# Altium PCB PCB.PcbDoc (part 1 of 2)
Units mm, origin at the board's own origin, x right, y up, seen from the top; angles counter-clockwise.
Board outline 100 x 25 mm, 4 copper layers (Top Layer, Layer 2, Layer 3, Bottom Layer), stack 1.513 mm thick; 98 components, 75 nets, 360 pads, 1081 vias.
Unrouted connection lines stored in the file: 86.
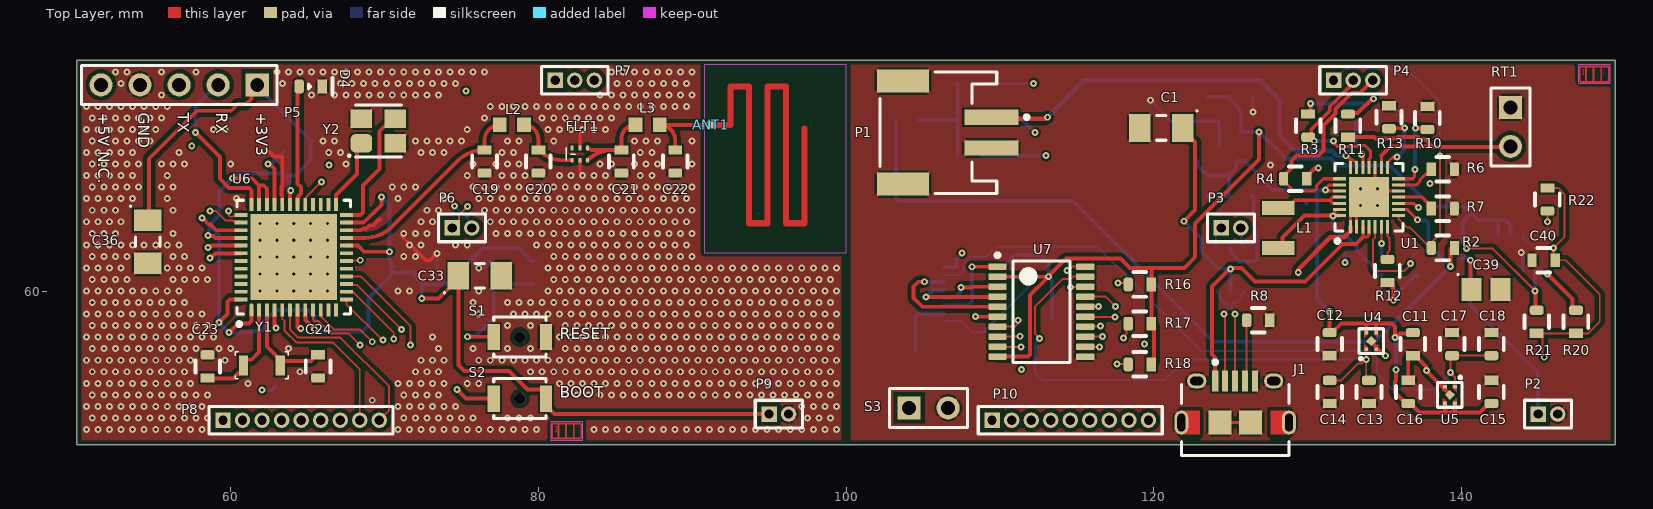
[diagram p0: Top Layer view]
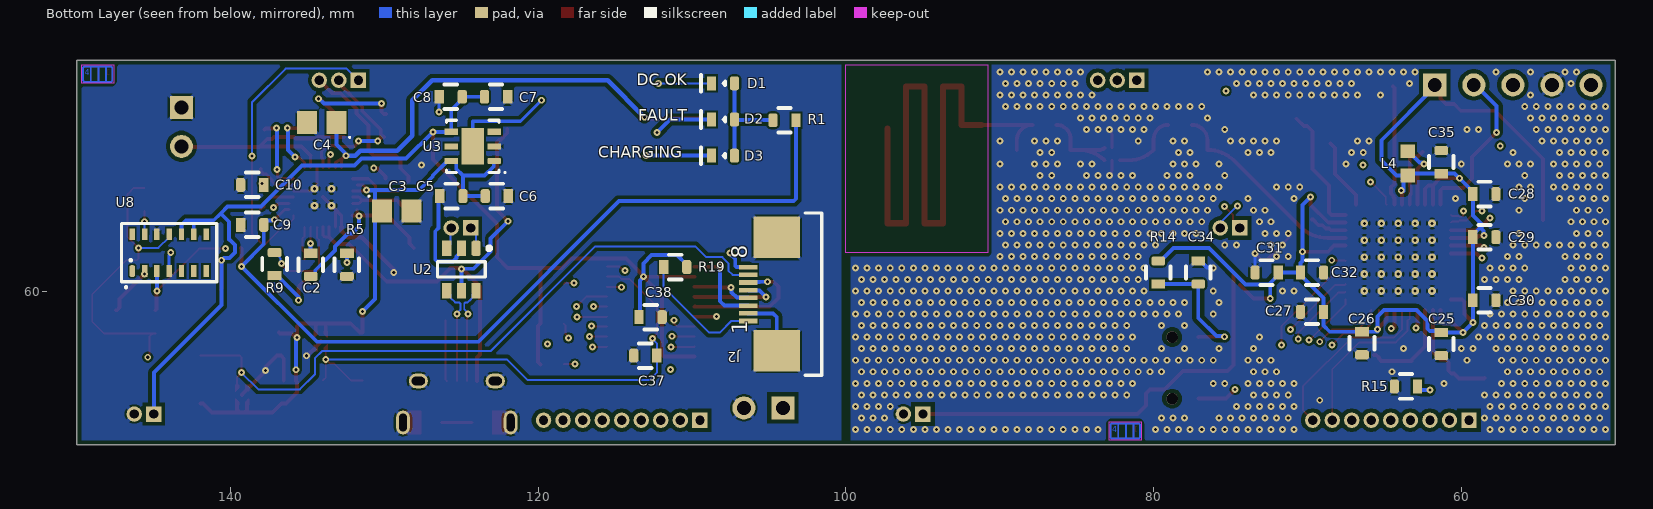
[diagram p1: Bottom Layer view, seen from below]
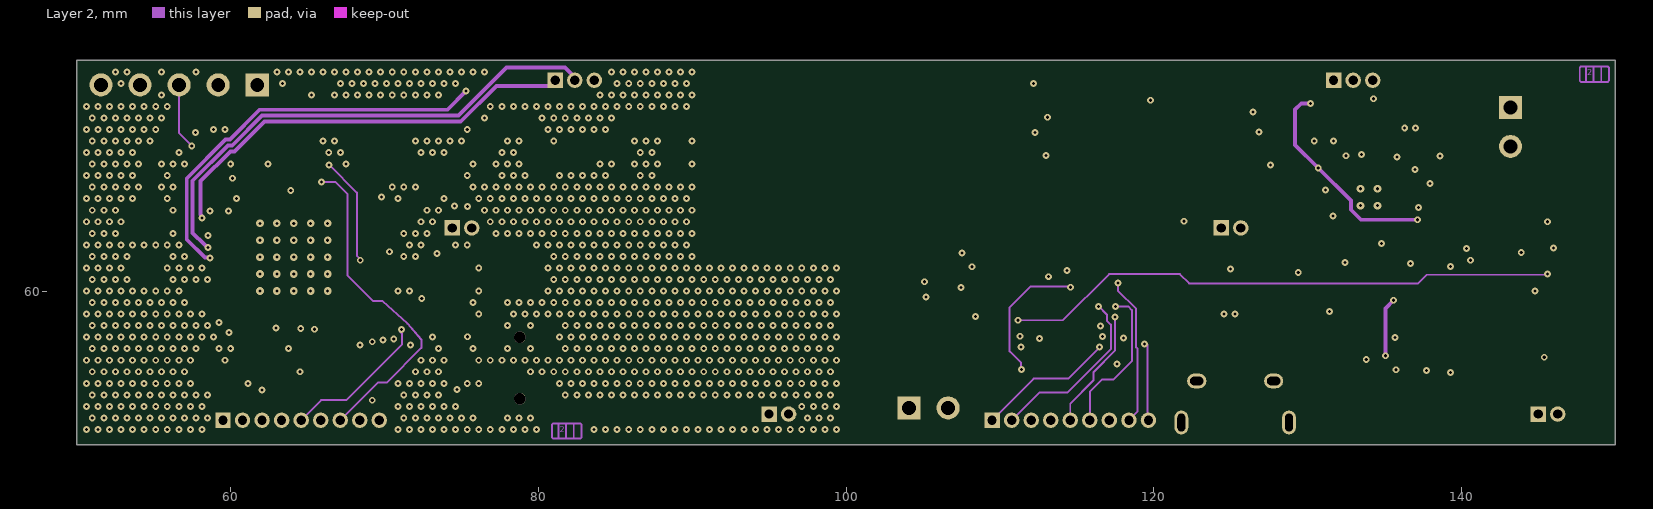
[diagram p2: Layer 2]
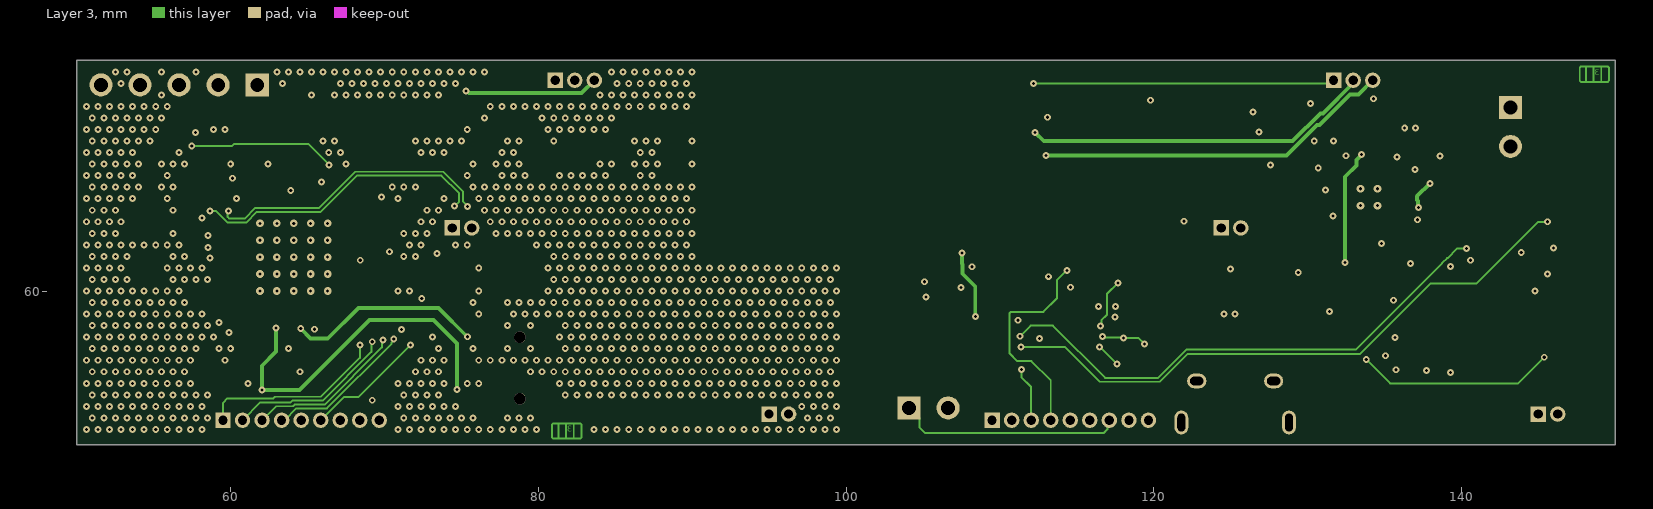
[diagram p3: Layer 3]
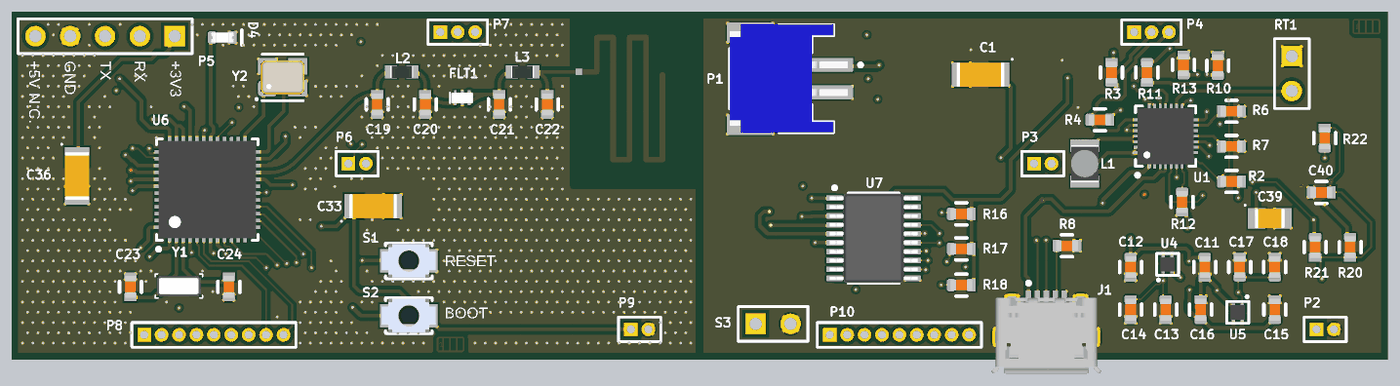
[diagram p5: 3D render of the assembled board from above, using the file's embedded part models]
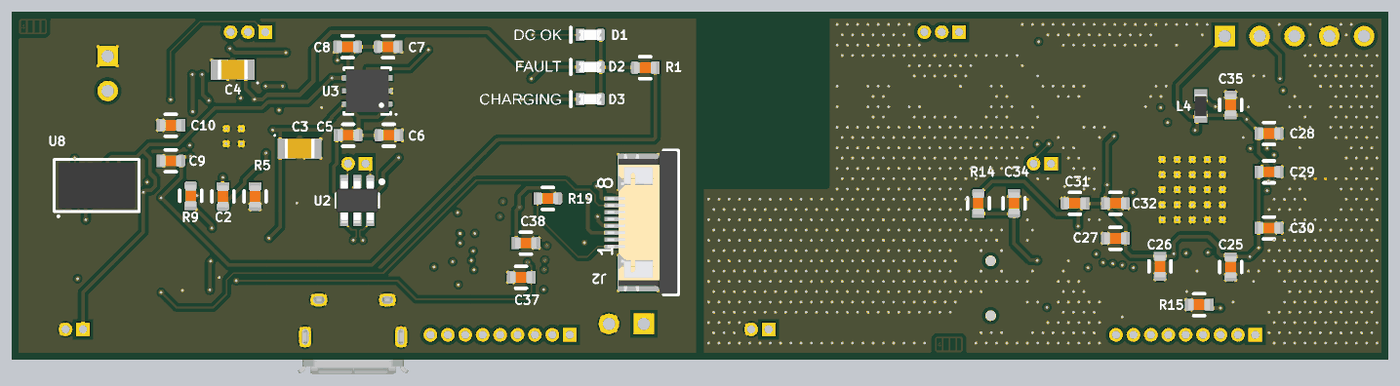
[diagram p6: 3D render of the assembled board from below, using the file's embedded part models]

## Layer stack, top to bottom
Top Solder: solder mask 0.0254, SM-001, Dk 4
Top Layer: signal copper 0.035
Dielectric 2: prepreg 0.2083, PP-022, Dk 4.5
Layer 2: signal copper 0.018
Dielectric 1: core 0.9906, Core-042, Dk 4.6
Layer 3: signal copper 0.018
Dielectric 3: prepreg 0.2083, PP-022, Dk 4.5
Bottom Layer: signal copper 0.035
Bottom Solder: solder mask 0.0254, SM-001, Dk 4

## Board outline
50,50 150,50 150,75 50,75

## Design rules (kind name [scope] priority, off if disabled: settings)
BoardOutlineClearance SilkScreen [OnSilkscreen] p1: gap=0.1 ignorepadtopadclearanceinfootprint=FALSE
BoardOutlineClearance [All] p2: gap=0.2 ignorepadtopadclearanceinfootprint=FALSE
Clearance [All] p1: gap=0.254 ignorepadtopadclearanceinfootprint=TRUE except(0: Arc-Hole Track-Hole SMDPad-Hole THPad-Hole Via-Hole Fill-Hole Poly-Hole Region-Hole Text-Hole; 0.127: Track-Track SMDPad-SMDPad SMDPad-Poly SMDPad-Region THPad-Region Via-Fill Via-Poly; 0.2: Arc-SMDPad Arc-THPad Track-SMDPad Track-THPad; 0.5: THPad-THPad)
ComponentClearance [All] p1: gap=0.05 collisioncheckmode=3 verticalgap=0.254 showdistances=FALSE
DiffPairsRouting [All] p1: maxlimit=0.254 minlimit=0.127 mostfreqgap=0.127 toplayer_minwidth=0.127 toplayer_maxwidth=0.381 toplayer_prefwidth=0.127 midlayer1_minwidth=0.127 midlayer1_maxwidth=0.381 midlayer1_prefwidth=0.127 midlayer2_minwidth=0.127 midlayer2_maxwidth=0.381 midlayer2_prefwidth=0.127 bottomlayer_minwidth=0.127 bottomlayer_maxwidth=0.381 bottomlayer_prefwidth=0.127 maxuncoupledlength=12.7
HoleSize [All] p1: absolutevalues=TRUE maxlimit=6.3 minlimit=0.2 maxpercent=80.000 minpercent=20.000
HoleToHoleClearance [All] p1: gap=0.5 allowstackedmicrovias=TRUE
MinimumSolderMaskSliver [All] p1: minsoldermaskwidth=0.01
PlaneClearance [All] p1: clearance=0.254
PlaneConnect [All] p1: planeconnectstyle=Relief reliefexpansion=0.508 reliefentries=4 reliefconductorwidth=0.254 reliefairgap=0.127
PolygonConnect PolygonConnect_2 [All vs (InNamedPolygon('GND_L01_P003') AND InNamedUnion('Via Stitchings'))] p1: connectstyle=Direct reliefconductorwidth=0.254 reliefentries=4 polygonreliefangle="90 Angle" airgapwidth=0.254
PolygonConnect PolygonConnect_1 [All vs (InNamedPolygon('GND_L01_P003') AND InNamedUnion('Via Stitchings'))] p2: connectstyle=Direct reliefconductorwidth=0.254 reliefentries=4 polygonreliefangle="90 Angle" airgapwidth=0.254
PolygonConnect [All] p3: connectstyle=Relief reliefconductorwidth=0.254 reliefentries=4 polygonreliefangle="45 Angle" airgapwidth=0.127
RoomDefinition U_IO [InComponentClass('U_IO')] p1: confinementstyle=ConfineIn formatcopy=TRUE lockcomponents=FALSE outline 63,50.3 148.9,50.3 148.9,74.8 63,74.8
RoomDefinition U_Power [InComponentClass('U_Power')] p2: confinementstyle=ConfineIn formatcopy=TRUE lockcomponents=FALSE outline 101.6,48.3 147.6,48.3 147.6,75.3 101.6,75.3
RoomDefinition U_STM32WB55 [InComponentClass('U_STM32WB55')] p3: confinementstyle=ConfineIn formatcopy=TRUE lockcomponents=FALSE outline 49.9,50.3 97.8,50.3 97.8,75 49.9,75
RoutingVias [All] p1: holewidth=0.3 width=0.5 viastyle="Through Hole" minholewidth=0.2 minwidth=0.45 maxholewidth=6.3 maxwidth=6.45
SilkToSolderMaskClearance [IsPad] p1: minsilkscreentomaskgap=0.02 clearancetoexposedcopper=TRUE
SolderMaskExpansion [All] p1: expansion=0.05 istentingtop=FALSE
UnRoutedNet [All] p1: checkbadconnections=TRUE
Width [All] p1: maxlimit=2 minlimit=0.127 preferedwidth=0.254
21 further rules are at their usual default settings.

## Classes and differential pairs
component class U_STM32WB55: ANT1 C19 C20 C21 C22 C23 C24 C25 C26 C27 C28 C29 C30 C31 C32 C33 C34 C35 C36 FLT1 L2 L3 L4 P5 P6 P7 P8 P9 R14 R15 S1 S2 U6 Y1 Y2
component class U_Power: C1 C2 C3 C4 C5 C6 C7 C8 C9 C10 C11 C12 C13 C14 C15 C16 C17 C18 D1 D2 D3 J1 P1 P2 P3 P4 R1 R2 R3 R4 R5 R6 R7 R8 R9 R10 R11 R12 R13 RT1 U1 U2 U3 U4 U5
component class U_IO: C37 C38 C39 C40 D4 J2 P10 R16 R17 R18 R19 R20 R21 R22 S3 U7 U8
differential pair USBIN: +USBIN_P -USBIN_N
differential pair USBSTM: +USBSTM_P -USBSTM_N
differential pair USBSTM: +USB_P -USB_N

## Components (designator, comment, footprint, x,y, rotation, side; value= is the part's Value field where it differs from the comment)
ANT1 "Meander Antenna 2.4GHz" Meander2.4G 91.2,70.8 r270 top
C1 "4.7uF" C_1206 120.5,70.6 r0 top
C2 "100nF" C_0603 134.8,61.7 r90 bottom
C3 "10uF" C_0805 129.2,65.2 r0 bottom
C4 "10uF" C_0805 134.077,70.953 r180 bottom
C5 "100nF" C_0603 125.654,66.171 r0 bottom
C6 "1uF" C_0603 122.7,66.171 r180 bottom
C7 "1uF" C_0603 122.746,72.629 r180 bottom
C8 "100nF" C_0603 125.7,72.629 r0 bottom
C9 "1uF" C_0603 138.6,64.3 r0 bottom
C10 "150nF" C_0603 138.6,66.9 r180 bottom
C11 "100nF" C_0603 136.85,56.546 r270 top
C12 "1uF" C_0603 131.442,56.546 r270 top
C13 "1uF" C_0603 131.446,53.441 r270 top
C14 "100nF" C_0603 134,53.441 r270 top
C15 "100nF" C_0603 141.963,53.441 r90 top
C16 "1uF" C_0603 136.554,53.441 r90 top
C17 "1uF" C_0603 139.404,56.546 r90 top
C18 "100nF" C_0603 141.959,56.546 r90 top
C19 "0.8pF" C_0603 76.5,68.421 r90 top
C20 "0.3pF" C_0603 80,68.421 r90 top
C21 "Not Fitted" C_0603 85.4,68.421 r90 top
C22 "1.2pF" C_0603 88.9,68.421 r90 top
C23 "20pF" C_0603 58.5,55.1 r270 top
C24 "20pF" C_0603 65.679,55.1 r90 top
C25 "100nF" C_0603 61.3,56.55 r90 bottom
C26 "100nF" C_0603 66.454,56.6 r90 bottom
C27 "100nF" C_0603 69.7,58.646 r180 bottom
C28 "100nF" C_0603 58.5,66.3 r0 bottom
C29 "100nF" C_0603 58.5,63.5 r0 bottom
C30 "100nF" C_0603 58.5,59.4 r0 bottom
C31 "100nF" C_0603 72.654,61.2 r180 bottom
C32 "100pF" C_0603 69.7,61.2 r0 bottom
C33 "4.7uF" C_1206 76.2,61 r180 top
C34 "100nF" C_0603 77.1,61.2 r90 bottom
C35 "100nF" C_0603 61.3,68.379 r270 bottom
C36 "4.7uF" C_1206 54.6,63.2 r90 top
C37 "100nF" C_0603 113.05,55.8 r180 bottom
C38 "100nF" C_0603 112.7,58.3 r0 bottom
C39 "10uF" C_0805 141.6,60.1 r180 top
C40 "1uF" C_0603 145.354,62 r0 top
D1 "RED" D-0603 108,73.5 r0 bottom
D2 "RED" D-0603 108,71.15 r0 bottom
D3 "RED" D-0603 108,68.799 r0 bottom
D4 "RED" D-0603 65.2,73.3 r0 top
FLT1 "LFB182G45BG4D268" LFB182G45BG4D268 82.7,68.9 r0 top
J1 "MicroUSB" FCI-10118194-0001LF-5_V 125.3,52.8 r0 top
J2 "68710814522" 68710814522 103.8,59.8 r90 bottom
L1 "2.2uH" L-1008 128.1,64.1 r270 top
L2 "2.7nH" L-0603 78.285,70.8 r0 top
L3 "3.6nH" L-0603 87.1,70.8 r0 top
L4 "10uH" L-0603 63.479,68.3 r270 bottom
P1 "JST-PH" "JST- S2B-PH-SM4-TB(LF)(SN)-2_V" 106,70.3 r270 top
P2 "PWR" MHDR1X2 145,52 r0 top
P3 "UART" MHDR1X2 124.4,64.1 r0 top
P4 "BAT" MHDR1X3 131.7,73.7 r0 top
P5 "Programmer" HDR1X5 61.726,73.4 r180 top
P6 "UART" MHDR1X2 74.4,64.1 r0 top
P7 "BAT" MHDR1X3 81.1,73.7 r0 top
P8 "MHDR1X9" MHDR1X9 59.5,51.6 r0 top
P9 "PWR" MHDR1X2 95,52 r0 top
P10 "MHDR1X9" MHDR1X9 109.5,51.6 r0 top
R1 "68R" C_0603 104,71.1 r180 bottom
R2 "10K" C_0603 138.8,62.8 r0 top
R3 "10K" C_0603 130.046,70.75 r90 top
R4 "10K" C_0603 129.2,67.3 r0 top
R5 "10K" C_0603 132.45,61.7 r90 bottom
R6 "1K2" C_0603 138.8,67.919 r180 top
R7 "3K" C_0603 138.8,65.354 r180 top
R8 "10K" C_0603 126.8,58.1 r0 top
R9 "10K" C_0603 137.15,61.75 r270 bottom
R10 "10K" C_0603 137.8,71.25 r90 top
R11 "10K" C_0603 132.633,70.75 r270 top
R12 "10K" C_0603 135.2,61.3 r270 top
R13 "10K" C_0603 135.3,71.3 r90 top
R14 "10K" C_0603 79.7,61.2 r270 bottom
R15 "10K" C_0603 63.6,53.796 r180 bottom
R16 "4K7" C_0603 119.1,60.429 r0 top
R17 "4K7" C_0603 119.1,57.875 r0 top
R18 "4K7" C_0603 119.1,55.229 r0 top
R19 "10K" C_0603 111.1,61.554 r0 bottom
R20 "4K7" C_0603 147.454,58 r270 top
R21 "4K7" C_0603 144.9,58 r270 top
R22 "4K7" C_0603 145.6,65.954 r90 top
RT1 "NTC" HDR1X2 143.2,71.94 r270 top
S1 "NRESET" B3U-1000P-B 78.8,57 r0 top
S2 "BOOT" B3U-1000P-B 78.8,53 r0 top
S3 "USR-BTN" HDR1X2 104.1,52.4 r0 top
U1 "MAX8903A" QFN28P40S400X400EP260x260 134,66.1 r90 top
U2 "USBLC6-2" SOT23-6P95R280X90 125,61.4 r270 bottom
U3 "LD39050PU33R" SON6P95S300X300EP237x149 124.265,69.4 r0 bottom
U4 "MIC5502-1.8YMT" DFN4P65S100x100EP48x48 134.146,56.746 r0 top
U5 "MIC5502-2.8YMT" DFN4P65S100x100EP48x48 139.259,53.241 r180 top
U6 "STM32WB55Cx" QFN48P50S700x700EP560x560 64.1,62.2 r90 top
U7 "TXB0108PWR" PW0020A_L 112.7,58.654 r0 top
U8 "MAX3010x" OESIP14R560x330 144,62.5 r90 bottom
Y1 "32.768kHz" ECX-31B 62.027,55.165 r0 top
Y2 "32MHz" Y_3225 69.6,70.4 r0 top

## Footprints (in the part's own frame and the unit in brackets; to place one, negate y for a bottom-side part, rotate by r counter-clockwise, add the part's x,y. Pads: shape width x height; smd on the part's side, far side on the other; paste and mask are expansions set on the pad)
68710814522 [mm] "ZIF Connectors, Horizontal, Bottom Contact, pitch 0.5mm, 8p"
  rect 0.3x1.2 smd: 1(-1.75,2.56) 2(-1.25,2.56) 3(-0.75,2.56) 4(-0.25,2.56) 5(0.25,2.56) 6(0.75,2.56) 7(1.25,2.56) 8(1.75,2.56)
  rect 2.7x3 smd: MP1(-3.68,0.7) MP2(3.68,0.7)
  silkscreen extent -5.27,-2.22 5.28,-1.12, body extent -5.2,-2.15 5.2,2.95, height 2.1
B3U-1000P-B [mm] "tactile Switch"
  rect 0.8x1.7 smd: 1(-1.7,0) 2(1.7,0)
  round 0.75 hole 0.75: ""(0,0)
  silkscreen extent -1.7,-1.3 1.7,1.3, body extent -2,-1.25 2,1.25, height 1.6
C_0603 [mm] "0603 package for CAP"
  rrect50% 0.6x0.9 smd: 1(-0.75,0)
  rect 0.6x0.9 smd: 2(0.75,0)
  silkscreen extent -0.4,-0.8 0.4,0.8, body extent -0.8,-0.4 0.8,0.4, height 0.5
C_0805 [mm] "0805 package for CAP"
  rect 1.3x1.5 smd: 1(-0.95,0) 2(0.95,0)
  silkscreen extent 1.76,-1.01 1.86,-0.91, body extent -1.1,-0.72 1.1,0.72, height 1.45
C_1206 [mm]
  rect 1.4x1.8 smd: 1(-1.4,0) 2(1.4,0)
  silkscreen extent -0.3,-0.8 2.36,1.16, body extent -1.75,-0.9 1.75,0.9, height 1.6
D-0603 [mm] "0603 package for LED"
  rrect50% 0.6x0.9 smd: 1(-0.75,0)
  rect 0.6x0.9 smd: 2(0.75,0)
  silkscreen extent -0.15,-0.54 1.43,0.54, body extent -0.82,-0.36 0.83,0.36, height 0.68
DFN4P65S100x100EP48x48 [mm] "DFN, 4-Leads, Body 1.00x1.00mm, Pitch 0.65mm, Thermal Pad 0.48x0.48mm, IPC Medium Density"
  rect 0.25x0.22 smd paste+0 mask+0.102: 1(-0.325,-0.54) 2(0.325,-0.54) 3(0.325,0.54) 4(-0.325,0.54)
  rect 0.48x0.48 smd rot 135: 5(0,0)
  Top Layer region: -0.45,-0.65 -0.45,-0.18 -0.2,-0.43 -0.2,-0.65
  Top Layer region: 0.45,-0.65 0.45,-0.25 0.38,-0.25 0.2,-0.43 0.2,-0.65
  Top Layer region: 0.45,0.65 0.45,0.25 0.38,0.25 0.2,0.43 0.2,0.65
  Top Layer region: -0.45,0.65 -0.45,0.25 -0.38,0.25 -0.2,0.43 -0.2,0.65
  silkscreen extent -0.8,-1.19 0.8,0.8, body extent -0.52,-0.52 0.53,0.53, height 0.6
ECX-31B [mm] "Crystal Oscillator 2Pins 3.2x1.5"
  rect 0.6x1.3 smd: 1(-1.2,0) 2(1.2,0)
  silkscreen extent -1.73,-0.87 1.73,0.87, body extent -1.6,-0.75 1.6,0.75, height 0.9
FCI-10118194-0001LF-5_V [mm] "SMD, 5-Leads, Body 7x5mm, Pitch 0.65 mm"
  rect 0.4x1.35 smd: 1(-1.3,1.35) 2(-0.65,1.35) 3(0,1.35) 4(0.65,1.35) 5(1.3,1.35)
  oval 1.25x0.95 hole 0.55 slot 0.85 at 0 deg: 6(-2.5,1.35) 7(2.5,1.35)
  oval 0.9x1.55 hole 0.5 slot 1.15 at 90 deg: 8(-3.5,-1.35) 9(3.5,-1.35)
  rect 1.5x1.55 smd: 10(-1,-1.35) 11(1,-1.35)
  Top Layer region: 3.501,-2.124 3.501,-0.574 2.301,-0.574 2.301,-2.124
  Top Layer region: -2.3,-2.124 -2.3,-0.574 -3.5,-0.574 -3.5,-2.124
  silkscreen extent -3.5,-3.5 3.5,2.7, body extent -4.02,-4.03 4.02,1.55, height 2.72
HDR1X2 [mm] "Connector; Header; 2 Position"
  rect 1.5x1.5 hole 0.9: 1(0,0)
  round 1.5 hole 0.9: 2(2.54,0)
  silkscreen extent -1.27,-1.27 3.81,1.27
HDR1X5 [mm] "Connector; Header; 5 Position"
  rect 1.5x1.5 hole 0.9: 1(0,0)
  round 1.5 hole 0.9: 2(2.54,0) 3(5.08,0) 4(7.62,0) 5(10.16,0)
  silkscreen extent -1.27,-1.27 11.43,1.27
"JST- S2B-PH-SM4-TB(LF)(SN)-2_V" [mm] "SMD, 2-Leads, Body 7.9x7.6mm, Pitch 2mm"
  rect 1x3.5 smd: 1(-1,3.45) 2(1,3.45)
  rect 1.5x3.4 smd: MP1(-3.35,-2.3) MP2(3.35,-2.3)
  silkscreen extent -3.95,-3.8 3.95,5.88, body extent -3.95,-3.8 3.95,4.8, height 5.6
L-0603 [mm] "Chip Inductor, 2-Leads, Body 1.60x0.80mm, IPC Medium Density"
  rect 0.89x0.94 smd: 1(-0.785,0) 2(0.785,0)
  body extent -0.85,-0.45 0.85,0.45, height 0.95
L-1008 [mm] "L 1008 square inductor"
  rect 0.9x2.1 smd: 1(-1.3,0) 2(1.3,0)
  body extent -1.35,-1 1.35,1, height 1.3
LFB182G45BG4D268 [mm]
  rrect50% 0.2x0.3 smd: 1(-0.5,-0.4)
  rect 0.2x0.3 smd: 2(0,-0.4) 3(0.5,-0.4) 4(0.5,0.4) 5(0,0.4) 6(-0.5,0.4)
  silkscreen extent -0.9,-0.4 -0.3,0.4, body extent -0.8,-0.4 0.8,0.4, height 0.39
Meander2.4G [mm]
  rect 0.48x0.48 smd mask+0.05: 1(0,0)
  Top Layer lines w0.4: 0,0 0,1.3 -2.5,1.3 -2.5,2.5 6.4,2.5 6.4,3.7 -2.5,3.7 -2.5,4.9 6.4,4.9 6.4,6.1 0.225,6.1
MHDR1X2 [mm] "Connector; Header; 2 Position"
  rect 1x1 hole 0.6: 1(0,0)
  round 1 hole 0.6: 2(1.27,0)
  silkscreen extent -0.9,-0.9 2.17,0.9
MHDR1X3 [mm] "Connector; Header; 3 Position"
  rect 1x1 hole 0.6: 1(0,0)
  round 1 hole 0.6: 2(1.27,0) 3(2.54,0)
  silkscreen extent -0.9,-0.9 3.44,0.9
MHDR1X9 [mm] "Connector; Header; 9 Position"
  rect 1x1 hole 0.6: 1(0,0)
  round 1 hole 0.6: 2(1.27,0) 3(2.54,0) 4(3.81,0) 5(5.08,0) 6(6.35,0) 7(7.62,0) 8(8.89,0) 9(10.16,0)
  silkscreen extent -0.9,-0.9 11.06,0.9
OESIP14R560x330 [mm] "14 pin OESIP 5.6mm by 3.3 mm"
  rrect50% 0.75x0.35 smd: 1(-1.2,2.4)
  rect 0.75x0.35 smd: 2(-1.2,1.6) 3(-1.2,0.8) 4(-1.2,0) 5(-1.2,-0.8) 6(-1.2,-1.6) 7(-1.2,-2.4) 8(1.2,-2.4) 9(1.2,-1.6) 10(1.2,-0.8) 11(1.2,0) 12(1.2,0.8) 13(1.2,1.6) 14(1.2,2.4)
  silkscreen extent -2.26,-3.09 1.9,3.1, body extent -1.65,-2.8 1.65,2.8, height 1.55
PW0020A_L [mm] "SOP, 20-Leads, Body 6.6x4.5mm, Pitch 0.65mm, IPC High Density"
  rrect25% 1.2x0.4 smd: 1(-2.85,2.925) 2(-2.85,2.275) 3(-2.85,1.625) 4(-2.85,0.975) 5(-2.85,0.325) 6(-2.85,-0.325) 7(-2.85,-0.975) 8(-2.85,-1.625) 9(-2.85,-2.275) 10(-2.85,-2.925) 11(2.85,-2.925) 12(2.85,-2.275) 13(2.85,-1.625) 14(2.85,-0.975) 15(2.85,-0.325) 16(2.85,0.325) 17(2.85,0.975) 18(2.85,1.625) 19(2.85,2.275) 20(2.85,2.925)
  silkscreen extent -2.97,-3.3 1.85,3.8, body extent -3.21,-3.25 3.21,3.25, height 1
QFN28P40S400X400EP260x260 [mm] "QFN, 28-Leads, Body 4.00x4.00mm, Pitch 0.40mm, Thermal Pad 2.60x2.60mm, IPC Medium Density"
  rrect50% 0.85x0.2 smd: 1(-1.925,1.2)
  rect 0.85x0.2 smd: 2(-1.925,0.8) 3(-1.925,0.4) 4(-1.925,0) 5(-1.925,-0.4) 6(-1.925,-0.8) 7(-1.925,-1.2) 15(1.925,-1.2) 16(1.925,-0.8) 17(1.925,-0.4) 18(1.925,0) 19(1.925,0.4) 20(1.925,0.8) 21(1.925,1.2)
  rect 0.2x0.85 smd: 8(-1.2,-1.925) 9(-0.8,-1.925) 10(-0.4,-1.925) 11(0,-1.925) 12(0.4,-1.925) 13(0.8,-1.925) 14(1.2,-1.925) 22(1.2,1.925) 23(0.8,1.925) 24(0.4,1.925) 25(0,1.925) 26(-0.4,1.925) 27(-0.8,1.925) 28(-1.2,1.925)
  rect 2.6x2.6 smd: 29(0,0)
  silkscreen extent -2.97,-2.2 2.2,2.2, body extent -2.05,-2.05 2.05,2.05, height 0.8
QFN48P50S700x700EP560x560 [mm] "QFN, 48-Leads, Body 7.00x7.00mm, Pitch 0.50mm, Thermal Pad 5.60x5.60mm, IPC Medium Density"
  oval 0.85x0.25 smd: 1(-3.425,2.75)
  rect 0.85x0.25 smd: 2(-3.425,2.25) 3(-3.425,1.75) 4(-3.425,1.25) 5(-3.425,0.75) 6(-3.425,0.25) 7(-3.425,-0.25) 8(-3.425,-0.75) 9(-3.425,-1.25) 10(-3.425,-1.75) 11(-3.425,-2.25) 12(-3.425,-2.75) 25(3.425,-2.75) 26(3.425,-2.25) 27(3.425,-1.75) 28(3.425,-1.25) 29(3.425,-0.75) 30(3.425,-0.25) 31(3.425,0.25) 32(3.425,0.75) 33(3.425,1.25) 34(3.425,1.75) 35(3.425,2.25) 36(3.425,2.75)
  rect 0.25x0.85 smd: 13(-2.75,-3.425) 14(-2.25,-3.425) 15(-1.75,-3.425) 16(-1.25,-3.425) 17(-0.75,-3.425) 18(-0.25,-3.425) 19(0.25,-3.425) 20(0.75,-3.425) 21(1.25,-3.425) 22(1.75,-3.425) 23(2.25,-3.425) 24(2.75,-3.425) 37(2.75,3.425) 38(2.25,3.425) 39(1.75,3.425) 40(1.25,3.425) 41(0.75,3.425) 42(0.25,3.425) 43(-0.25,3.425) 44(-0.75,3.425) 45(-1.25,3.425) 46(-1.75,3.425) 47(-2.25,3.425) 48(-2.75,3.425)
  rect 5.6x5.6 smd: 49(0,0)
  silkscreen extent -4.47,-3.7 3.7,3.7, body extent -3.55,-3.55 3.55,3.55, height 0.6
SON6P95S300X300EP237x149 [mm] "SON, 6-Leads, Body 3.00x3.00mm, Pitch 0.95mm, Thermal Pad 2.37x1.49mm, IPC Medium Density"
  rrect50% 0.9x0.4 smd: 1(-1.395,0.95)
  rect 0.9x0.4 smd: 2(-1.395,0) 3(-1.395,-0.95) 4(1.395,-0.95) 5(1.395,0) 6(1.395,0.95)
  rect 1.49x2.37 smd: 7(0,0)
  silkscreen extent -2.15,-1.7 1.7,1.75, body extent -1.55,-1.55 1.55,1.55, height 1
SOT23-6P95R280X90 [mm] "SOT23, 6-Leads, Body 2.93x2.80mm, Pitch 0.95mm, IPC Medium Density"
  rrect50% 1x0.6 smd: 1(-1.375,0.95)
  rect 1x0.6 smd: 2(-1.375,0) 3(-1.375,-0.95) 4(1.375,-0.95) 5(1.375,0) 6(1.375,0.95)
  silkscreen extent -1.5,-1.55 0.5,1.92, body extent -1.6,-1.53 1.6,1.53, height 0.9
Y_3225 [mm] "Crystal, 4-Leads, Body 2.50x3.20mm, Pitch 2.20mm, IPC Low Density"
  rrect50% 1.4x1.2 smd: 1(-1.1,-0.8)
  rect 1.4x1.2 smd: 2(1.1,-0.8) 3(1.1,0.8) 4(-1.1,0.8)
  silkscreen extent -1.95,-1.7 1.5,1.7, body extent -1.6,-1.25 1.6,1.25, height 0.61

## Part data
ANT1: "PCB TRACE / DONT TRY TO LOOK FOR PARTS"
C1 C2 C3 C4 C5 C6 C7 C8 C9 C10 C11 C12 C13 C14 C15 C16 C17 C18 C19 C20 C21 C22 C23 C24 C25 C26 C27 C28 C29 C30 C31 C32 C33 C34 C35 C36 C37 C38 C39 C40: library part Cap, "Capacitor", LatestRevisionDate=17-Jul-2002, LatestRevisionNote="Re-released for DXP Platform.", PackageDescription="Radial Cap, Thru-Hole; 2 Leads; 0.3 in Pin Spacing", PackageReference=RAD-0.3, Published=8-Jun-2000, Publisher="Altium Limited"
D1 D2 D3 D4: library part LED2, "Typical RED, GREEN, YELLOW, AMBER GaAs LED", LatestRevisionDate=17-Jul-2002, LatestRevisionNote="Re-released for DXP Platform.", PackageDescription="SM LED; 2 Flat Leads", PackageReference=3.2X1.6X1.1, PackageVersion=Feb-2002, Published=8-Jun-2000, Publisher="Altium Limited"
FLT1: "Ultra-small, low-profiled, lightweight band-pass filters."
J1: library part CMP-2000-05120-1, "Micro USB B Type Receptacle, 1.8 A, -55 to 85 degC, 5-Pin SMD, RoHS, Tape and Reel", Manufacturer="Amphenol FCI", Package Description="5-Pin Surface Mount Device, Body 8.05 x 5.53 mm, Pitch 0.65 mm", Package Reference=10118194-0001LF-5, Body Orientation=RightAngle, Datasheet URL=https://datasheet.ciiva.com/26945/getdatasheetpartid-418619-26945695.pdf, Datasheet Version="Rev. A, 10/2011", Gender=RCP, Manufacturer URL=http://www.fci.com/, Mounting=SurfaceMount, Number of Contacts=5, Packaging=CutTape, Pitch=0.65mm, Rad Hard=No, Termination Method=Solder, Type=MicroUSBTypeB
J2: library part CMP-1502-01528-1, "SMT ZIF Connectors WR-FPC, Horizontal, Bottom Contact, pitch 0.5 mm, 8 pins", Contact Resistance=20mOhm, Manufacturer="Wurth Elektronik", Operating Temperature=-25to85degC, Rated Current=0.5A, Withstanding Voltage=250VAC, Working Voltage=50VAC, Contact Design=BottomContact, Datasheet URL=https://katalog.we-online.de/em/datasheet/68710814522.pdf, Manufacturer URL=http://www.we-online.de, Mounting Technology=SMT, Orientation=Horizontal, Package Reference=68710814522, Packaging=TapeandReel, Part Number=68710814522, Pin Number=8, Pitch=0.5mm, Publisher=WurthElektronik
L1 L2 L3 L4: library part Inductor, "Inductor", Code_IEC=1005, Code_JEITA=0402, LatestRevisionDate=29-May-2009, LatestRevisionNote="IPC-7351 Footprint Added.", PackageDescription="Chip Inductor", PackageReference=0402-A, Published=8-Jun-2000, Publisher="Altium Limited"
P1: library part CMP-1755-00001-1, "Male Header, Pitch 2 mm, 1 x 2 Position, Height 5.5 mm, -25 to 85 degC, RoHS, Tape and Reel", Colour=Black, Current Rating="3 A", Max Operating Temperature=105degC, Min Operating Temperature=-65degC, Package Quantity=100, ComponentLink1Description="Manufacturer URL", ComponentLink1URL=http://www.jst.com/home2.html, ComponentLink2Description=Datasheet, ComponentLink2URL=http://www.jst-mfg.com/product/pdf/eng/ePH.pdf, Contact Finish=Lead, Contact Material=Bronze, Contact Plating=Tin, DatasheetVersion=Dec-12, Height="8.13 mm", Lead Pitch="0.1 inch", Length="101.19 mm", Mount="Through Hole", PackageDescription="Male Header, Pitch 2 mm, 1 x 2 Position, Height 5.5 mm", PackageReference=S2B-PH-SM4-TB(LF)(SN)-2, Packaging=Bulk, Pins=40, Radiation Hardening=No, RoHSCompliant=True, Width="2.34 mm"
P2 P3 P6 P9: library part MHDR1X2, "Header, 2-Pin", LatestRevisionDate=17-Jul-2002, LatestRevisionNote="Re-released for DXP Platform.", Publisher="Altium Limited"
P4 P7: library part MHDR1X3, "Header, 3-Pin", LatestRevisionDate=17-Jul-2002, LatestRevisionNote="Re-released for DXP Platform.", Publisher="Altium Limited"
P5: library part MHDR1X5, "Header, 5-Pin", LatestRevisionDate=17-Jul-2002, LatestRevisionNote="Re-released for DXP Platform.", Publisher="Altium Limited"
P8 P10: "Header, 9-Pin", LatestRevisionDate=17-Jul-2002, LatestRevisionNote="Re-released for DXP Platform.", Publisher="Altium Limited"
R1 R2 R3 R4 R5 R6 R7 R8 R9 R10 R11 R12 R13 R14 R15 R16 R17 R18 R19 R20 R21 R22: library part Res1, "Resistor", LatestRevisionDate=17-Jul-2002, LatestRevisionNote="Re-released for DXP Platform.", PackageDescription="Axial Device, Thru-Hole; 2 Leads; 0.3 in Pin Spacing", PackageReference=AXIAL-0.3, Published=8-Jun-2000, Publisher="Altium Limited"
RT1: library part NTC/PTC, "2322-640-63103"
S1 S2 S3: library part SW-SPST, "Single-Pole, Single-Throw Switch", LatestRevisionDate=17-Jul-2002, LatestRevisionNote="Re-released for DXP Platform.", PackageDescription="Switch; 2 Leads", PackageReference=SPST-2, Published=24-Mar-1999, Publisher="Altium Limited"
U1: "2A 1-Cell Li+ DC-DC Chargersfor USB and Adapter Power"
U2: "Very low capacitance ESD protection"
U3: library part LD39050PUxxR, "500 mA low quiescent current and low noise voltage regulator"
U4 U5: library part MIC550x-x.xYMT, "Single 300mA LDO"
U6: "Multiprotocol wireless 32-bit MCU Arm®-based Cortex®-M4 with FPU, Bluetooth® 5 and 802.15.4 radio solution"
U7: library part CMP-2000-07337-1, "TXB0108 8-Bit Bidirectional Voltage-Level Translator with Auto-Direction Sensing and / +/- 15-kV ESD Protection, 1.2 to 3.6 V, -40 to 85 degC, 20-Pin TSSOP (PW), Green (RoHS & no Sb/Br), Tape and Reel", Manufacturer="Texas Instruments", Operating Temperature=-40°C~85°C, Package / Case="20-TSSOP(0.173\",4.40mmWidth)", Package Description="20-Pin Small Outline Package Integrated Circuit, Body 6.5 x 4.4 mm, Pitch 0.65 mm", Package Reference=PW20, Package Version="4040064-5/G, 02/2011", Standard Package=1, Supplier Device Package=20-TSSOP, Voltage - Supply=1.2V~3.6V,1.65V~5.5V, Category=IntegratedCircuits(ICs), Data Rate=100Mbps, Datasheet URL=http://www.ti.com/general/docs/lit/getliterature.tsp?genericPartNumber=TXB0108&fileType=pdf, Datasheet Version="Rev. F, 12/2014", Differential - Input=Output:No/No, Dynamic Catalog=TXBSeries, Family=Logic-Translators, Input Type=Logic, Logic Function=Translator,Bidirectional, Manufacturer URL=http://www.ti.com/, Mounting Technology=SurfaceMount, Number of Bits=8, Number of Channels=8, Number of Outputs/Channel=1, Other Names=296-21527-6, Output Type=Logic, Package URL=http://www.ti.com/litv/pdf/mpds362, Packaging=Digi-Reel®, Product Training Modules=VoltageLevelTranslation, Propagation Delay (Max)=4ns, Series=-
U8: "Pulse Oximeter and Heart-Rate Sensor IC  for Wearable Health"
Y1: library part "XTAL 3215"
Y2: library part "XTAL 3225 2_4GND"

## Via types
v1: diameter 0.45, hole 0.2, Top Layer to Bottom Layer, tented both sides, 1052 vias
v2: diameter 0.5, hole 0.2, Top Layer to Bottom Layer, 29 vias

## Nets (pads, with @x,y where several pads share a name; then routed paths per layer and width w, separated by ;. In a path a pad name is that pad's centre, name@x,y a point inside that pad or via, vN(x,y) a via of type N, cw(c..) or ccw(c..) an arc to the next point about the centre after c; other vN are vias at no path point)
30100_nINT: P10.1 R18.1 U7.12 | length 12.3
  Top Layer w0.127: U7.12@115.55,56.379 115.565,56.364 116.476,56.364 v1(116.491,56.348) ; v1(117.629,55.25) 118.329,55.25 R18.1@118.35,55.229
  Layer 2 w0.127: P10.1@109.5,51.6 112.2,54.3 114.443,54.3 v1(116.491,56.348)
  Layer 3 w0.127: v1(116.491,56.348) 116.53,56.348 v1(117.629,55.25)
  Bottom Layer w0.127: v1(116.491,56.348) 116.5,56.357 v1@116.5,56.379
30100_nINT_1V8: R22.1 U7.9 U8.13 | length 42.5
  Top Layer w0.127: U7.9@109.85,56.379 109.862,56.368 111.353,56.368 v1(111.365,56.356) ; v1(145.6,64.5) R22.1@145.6,65.204
  Layer 3 w0.127: v1(111.365,56.356) 111.366,56.357 114.243,56.357 116.5,54.1 120.4,54.1 122.2,55.9 133.4,55.9 138,60.5 141,60.5 145,64.5 v1(145.6,64.5)
  Bottom Layer w0.127: U8.13@145.6,63.7 v1(145.6,64.5)
30100_nINT_STM: P8.1 U6.9 | length 16.4
  Top Layer w0.127: U6.9@65.35,58.775 65.35,58.16 65.454,58.056 65.675,58.056 66.506,57.225 67.675,57.225 v1(68.4,56.5)
  Layer 3 w0.127: P8.1@59.5,51.6 59.5,52.733 59.783,53.017 62.77,53.017 62.879,53.126 65.866,53.126 68.4,55.659 v1(68.4,56.5)
+1V8: C13.1 C14.1 C37.2 C40.2 R20.2 R21.2 R22.2 U4.1 U7.19 U8.11 | length 68.9
  Top Layer w0.127: v1(112.577,56.9) 112.577,56.934 112.3,57.211 112.3,59 114.087,60.787 114.602,60.787 114.744,60.929 U7.19@115.55,60.929 ; C13.1@131.446,54.191 132.191,54.191 133.288,55.288 133.555,55.288 v1@133.821,55.554 ; U4.1@133.821,56.206 133.821,55.555 133.821,54.371 C14.1@134,54.191 ; R21.2@144.9,57.25 R21.2@145.05,57.25 ; v1(145.394,55.694) 145.394,55.782 145.287,55.889 145.287,57.014 R21.2@145.05,57.25 ; R22.2@145.6,66.704 146.296,66.704 146.7,66.3 146.7,63.5 v1(146,62.8) 146,62.104 C40.2@146.104,62 146.8,62 149,59.8 149,58 148.25,57.25 R20.2@147.454,57.25 R21.2@145.05,57.25
  Layer 3 w0.127: v1(133.821,55.554) 135.375,54 143.7,54 v1(145.394,55.694)
  Bottom Layer w0.127: v1(112.577,56.9) 112.577,56.866 112.3,56.589 112.3,54.7 112.8,54.2 120.7,54.2 122.055,55.555 v1@133.821,55.555 ; U8.11@144,63.7 144,63.5 144.7,62.8 v1(146,62.8)
+2V8: C17.1 C18.1 J2.7 U5.1 | length 43.6
  Top Layer w0.127: U5.1@139.583,53.782 139.583,54.396 139.3,54.679 v1(139.3,54.7) 139.3,55.691 C17.1@139.404,55.796 C18.1@141.959,55.796
  Bottom Layer w0.127: J2.7@106.36,61.05 107.376,61.05 107.642,61.316 107.642,61.804 108.038,62.2 109.1,62.2 109.8,62.9 116.3,62.9 123.1,56.1 134.043,56.1 134.527,55.615 134.527,54.573 135.5,53.6 138.2,53.6 v1(139.3,54.7)
+3V3: C7.1 C8.1 C25.2 C26.2 C27.2 C28.2 C29.2 C30.2 C31.2 C32.2 C33.2 C35.2 C36.2 C38.2 C39.2 L4.2 P2.1 P5.1 P9.1 R14.1 R16.2 R17.2 R18.2 R19.1 S2.2 U3.4 U6.1 U6.8 U6.20 U6.23 U6.31 U6.34 U6.35 U6.40 U6.48 U7.2 U7.10 U8.9 U8.10 | length 210.4
  Top Layer w0.254: C36.2@54.7,64.6 54.7,68.6 57.82,71.72 60.035,71.72 60.458,72.144 61.001,72.144 61.356,72.499 61.356,73.03 P5.1@61.726,73.4 ; v1(58.534,63.619) 58.572,63.582 58.879,63.582 59.009,63.452 60.673,63.452 U6.40@60.675,63.45 ; v1(59.25,57.95) 59.8,58.5 59.8,59.3 59.95,59.45 U6.48@60.675,59.45 ; v1(59.9,57.3) 60.5,57.9 61.201,57.9 61.35,58.049 U6.1@61.35,58.775 ; v1(60.129,67.329) 61.371,67.329 61.85,66.85 ; U6.35@61.85,65.625 61.85,66.85 ; U6.34@62.35,65.625 62.35,66.65 62.15,66.85 61.85,66.85 ; U6.31@63.85,65.625 63.848,65.627 63.848,66.343 63.823,66.367 63.949,66.493 v1(63.904,66.537) ; U6.8@64.85,58.775 64.852,58.773 64.852,58.121 65.45,57.523 v1(65.45,57.513) ; U6.20@67.525,62.95 68.272,62.95 68.669,62.553 v1(70.31,62.553) ; U6.23@67.525,64.45 68.65,64.45 69.8,65.6 v1(69.8,66.1) ; v1(72.421,59.521) 73.521,59.521 C33.2@74.4,60.4 ; C33.2@74.8,61 74.8,55.2 75.2,54.8 78.1,54.8 79.3,53.6 80.227,53.6 80.5,53.327 S2.2@80.5,53 80.5,52.55 81.05,52 P9.1@95,52 ; U7.10@109.85,55.729 111.822,55.729 111.971,55.878 111.971,59.729 v1(113.171,60.929) ; U7.2@109.85,60.929 v1(113.171,60.929) ; R18.2@119.85,55.229 120.012,55.391 120.012,57.713 R17.2@119.85,57.875 R16.2@119.85,60.429 119.85,61.436 119.9,61.486 ; v1(126.85,70.35) 126.85,68.55 122.7,64.4 122.7,62.193 121.993,61.486 119.9,61.486 ; v1(140.6,62) 140.6,60.15 C39.2@140.65,60.1 ; v1(113.171,60.929) 113.171,60.98 114.297,62.106 117.835,62.106 118.455,61.486 119.9,61.486
  Bottom Layer w0.254: v1(58.534,63.619) 58.567,63.651 58.567,63.92 58.749,64.102 ; P5.1@61.6,73.4 65.2,69.8 65.2,68.5 64.215,67.515 L4.2@63.479,67.515 63.365,67.629 C35.2@61.3,67.629 60.429,67.629 v1(60.129,67.329) 59.25,66.45 59.25,64.901 58.6,64.251 58.749,64.102 ; L4.2@63.504,67.515 63.822,67.197 63.744,67.197 63.744,66.5 63.904,66.5 v1(63.904,66.537) ; v1(69.8,66.1) 70.31,65.59 v1(70.31,62.553) 70.325,62.537 70.325,61.947 70.45,61.822 C32.2@70.45,61.2 ; v1(72.421,59.521) 72.421,60.534 ; R14.1@79.7,61.95 79.55,61.95 78.7,62.8 76.4,62.8 74.023,60.423 72.531,60.423 72.421,60.534 ; R19.1@110.35,61.554 110.35,61.704 110.977,62.331 112.633,62.331 113.171,61.794 v1(113.171,60.929) 113.171,60.912 113.4,60.682 113.4,58.35 C38.2@113.45,58.3 C38.2@113.4,58.25 ; C7.1@123.496,72.629 C8.1@124.95,72.629 124.95,72.479 125.66,71.769 U3.4@125.66,70.35 v1(126.85,70.35) 128.594,68.606 131.498,68.606 131.943,68.161 135.377,68.161 138.038,65.5 140.2,65.5 140.65,65.05 ; U8.9@142.4,63.7 142.4,64.451 142.549,64.6 ; U8.10@143.2,63.7 143.2,64.3 142.9,64.6 142.549,64.6 ; P2.1@145,52 145,54.7 140.6,59.1 v1(140.6,62) 140.455,62.145 140.078,62.145 139.723,62.5 139.723,63.002 140.078,63.357 140.1,63.357 140.1,64.5 140.65,65.05 ; 58.749,64.102 58.798,64.102 59.25,63.65 C29.2@59.25,63.5 C30.2@59.25,59.4 v1(59.25,57.95) v1(59.9,57.3) C25.2@61.3,57.3 61.4,57.4 62.037,57.4 62.186,57.549 62.186,58.043 62.918,58.775 65.025,58.775 65.45,58.35 v1(65.45,57.513) 65.45,57.35 C26.2@66.454,57.35 68.55,57.35 68.95,57.75 C27.2@68.95,58.646 68.95,59.55 70.45,61.05 C32.2@70.45,61.2 ; C32.2@70.45,61.2 C31.2@71.904,61.2 71.904,61.05 72.421,60.534 ; 140.65,65.05 141.1,64.6 142.549,64.6
BOOT0: R15.2 S2.1 U6.4 | length 27.4
  Top Layer w0.254: U6.4@62.85,58.775 62.85,57.759 62.956,57.653 v1(62.956,57.6) ; v1(74.7,53.6) 75.3,53 S2.1@77.1,53
  Layer 3 w0.254: v1(62.956,57.6) 62.956,56.056 62.042,55.142 v1(62.042,53.559) 64.459,53.559 69.013,58.113 73.187,58.113 74.7,56.6 v1(74.7,53.6)
  Bottom Layer w0.254: v1(62.042,53.559) 62.677,53.559 62.85,53.732 R15.2@62.85,53.796
CHARGEINDICATOR: D3.2 P4.3 R4.1 U1.22 | length 42
  Top Layer w0.2: R4.1@128.45,67.15 129.1,66.5 130.46,66.5 130.577,66.617 130.577,66.829 131.048,67.3 U1.22@132.075,67.3
  Top Layer w0.254: R4.1@128.45,67.15 R4.1@128.45,67.3 128.45,67.462 128.968,67.98 128.968,68.468 129.3,68.8 130.726,68.8 131.048,69.122 131.048,70.751 131.828,71.531 131.828,71.82 132.882,72.873 133.413,72.873 P4.3@134.24,73.7
  Layer 3 w0.254: v1(112.999,68.799) 128.633,68.799 130.62,70.786 130.787,70.786 132.774,72.773 133.313,72.773 P4.3@134.24,73.7
  Bottom Layer w0.254: D3.2@108.75,68.799 v1(112.999,68.799)
CHARGEINDICATOR_STM: P7.3 U6.42 | length 37.4
  Top Layer w0.254: v1(58.644,62.133) 58.697,62.133 59.014,62.45 U6.42@60.675,62.45
  Layer 2 w0.254: v1(58.644,62.133) 58.606,62.17 58.326,62.17 57.142,63.354 57.142,67.326 59.659,69.844 59.942,69.844 61.879,71.781 74.081,71.781 v1(75.3,73)
  Layer 3 w0.254: v1(75.3,73) 75.353,73 75.48,72.873 82.813,72.873 P7.3@83.64,73.7
D_CLK: J2.6 U7.5 | length 8.6
  Top Layer w0.254: v1(105.1,60.6) 104.7,60.6 104.4,60.3 104.4,59.549 104.97,58.979 109.808,58.979 109.829,59 U7.5@109.85,58.979
  Bottom Layer w0.254: v1(105.1,60.6) 105.598,60.6 105.625,60.573 106.337,60.573 J2.6@106.36,60.55
D_CS: J2.8 U7.6 | length 7.8
  Top Layer w0.254: v1(108.429,58.329) U7.6@109.85,58.329
  Layer 3 w0.254: v1(107.535,62.465) 107.535,61.775 107.578,61.732 107.578,61.122 108.4,60.3 108.4,58.359 v1(108.429,58.329)
  Bottom Layer w0.254: J2.8@106.36,61.55 107.126,61.55 107.2,61.624 107.2,62.076 107.535,62.412 v1(107.535,62.465)
D_RESET: J2.3 U7.1 | length 5.9
  Top Layer w0.254: v1(108.184,61.579) U7.1@109.85,61.579
  Bottom Layer w0.254: J2.3@106.36,59.05 107.901,59.05 108.184,59.333 v1(108.184,61.579)
D_RS: J2.4 U7.3 | length 4
  Top Layer w0.254: v1(107.47,60.234) 108.158,60.234 108.203,60.279 U7.3@109.85,60.279
  Bottom Layer w0.254: J2.4@106.36,59.55 106.383,59.573 107.095,59.573 107.432,59.91 107.432,60.197 v1(107.47,60.234)
D_SDA: J2.5 U7.4 | length 6
  Top Layer w0.254: v1(105.2,59.606) 105.206,59.6 109.821,59.6 U7.4@109.85,59.629
  Bottom Layer w0.254: v1(105.2,59.606) 105.204,59.606 105.625,60.027 106.337,60.027 J2.5@106.36,60.05
DCPWROK: D1.2 P4.1 R2.1 U1.8 | length 43.7
  Top Layer w0.127: U1.8@135.925,64.9 135.925,64.675 136.476,64.124 136.676,64.124 137.85,62.95 138.616,63.716 v1(138.616,68.767)
  Layer 3 w0.127: v1(112.2,73.5) 131.5,73.5 P4.1@131.7,73.7
  Bottom Layer w0.127: D1.2@108.75,73.5 v1(112.2,73.5) ; P4.1@131.7,73.7 132.464,74.464 136.436,74.464 138.616,72.284 v1(138.616,68.767)
DCPWROK_STM: P7.1 U6.39 | length 31.1
  Top Layer w0.254: v1(58.129,64.734) 58.165,64.734 58.575,64.323 58.688,64.323 59.061,63.95 U6.39@60.675,63.95
  Layer 2 w0.254: v1(58.129,64.734) 58.091,64.771 58.091,64.909 58.038,64.962 58.038,67.145 59.975,69.082 60.258,69.082 62.195,71.019 74.958,71.019 77.266,73.327 80.727,73.327 P7.1@81.1,73.7
DISPLAY_RESET: P10.4 U7.20 | length 15.5
  Top Layer w0.127: v1(114.378,61.33) 114.465,61.33 114.714,61.579 U7.20@115.55,61.579
  Layer 3 w0.127: P10.4@113.31,51.6 113.31,54.19 112.051,55.449 111.126,55.449 110.638,55.937 110.638,57.866 110.628,57.875 110.628,58.325 110.638,58.334 110.638,58.563 110.712,58.638 110.941,58.638 110.946,58.643 111.396,58.643 111.401,58.638 112.838,58.638 113.713,59.513 113.713,60.713 114.33,61.33 v1(114.378,61.33)
DISPLAY_RESET_STM: P8.4 U6.14 | length 14.2
  Top Layer w0.127: U6.14@67.525,59.95 67.587,59.888 68.009,59.888 70.6,57.298 v1(70.6,56.875)
  Layer 3 w0.127: P8.4@63.31,51.6 63.5,51.6 64.264,52.364 66.254,52.364 70.439,56.548 70.439,56.626 70.6,56.788 v1(70.6,56.875)
DISPLAY_RS: P10.3 U7.18 | length 13.4
  Top Layer w0.127: v1(114.6,60.245) 114.617,60.262 115.533,60.262 U7.18@115.55,60.279
  Layer 2 w0.127: v1(111.4,54.906) 111.385,54.921 111.385,55.322 110.638,56.069 110.638,57.866 110.628,57.875 110.628,58.325 110.638,58.334 110.638,58.938 112,60.3 114.545,60.3 v1(114.6,60.245)
  Layer 3 w0.127: v1(111.4,54.906) 111.4,54.4 112.04,53.76 P10.3@112.04,51.6
DISPLAY_RS_STM: P8.3 U6.13 | length 14
  Top Layer w0.127: U6.13@67.525,59.45 67.525,59.142 69.742,56.925 69.742,56.806 v1(69.896,56.806)
  Layer 3 w0.127: P8.3@62.04,51.6 62.949,52.509 64.05,52.509 64.159,52.618 66.118,52.618 69.834,56.334 69.834,56.664 69.936,56.766 v1(69.896,56.806)
FAULTOUT: D2.2 P4.2 R3.1 U1.18 | length 37
  Top Layer w0.2: v1(131.682,69.742) 131.682,69.675 131.928,69.429 131.928,69.4 133.205,69.4 133.266,69.461 133.746,69.461 134.085,69.122 134.085,68.659 134,68.574 U1.18@134,68.025
  Top Layer w0.254: R3.1@130.046,70 130.077,70 130.248,70.171 130.248,70.49 131.447,71.689 131.447,71.977 132.97,73.5 P4.2@132.97,73.7 ; R3.1@130.183,70 130.194,70 130.442,69.752 v1(130.442,69.751)
  Layer 3 w0.254: v1(112.3,70.3) 112.856,69.744 129.039,69.744 130.847,71.552 131.014,71.552 132.97,73.508 P4.2@132.97,73.7
  Bottom Layer w0.254: D2.2@108.75,71.15 111.45,71.15 v1(112.3,70.3) ; v1(130.442,69.751) 130.446,69.747 131.678,69.747 v1(131.682,69.742)
FAULTOUT_STM: P7.2 U6.41 | length 35.3
  Top Layer w0.254: v1(58.526,62.827) 58.637,62.827 58.76,62.95 U6.41@60.675,62.95
  Layer 2 w0.254: v1(58.526,62.827) 58.473,62.827 58.287,63.013 58.283,63.013 57.523,63.774 57.523,67.168 59.817,69.463 60.1,69.463 62.037,71.4 74.8,71.4 77.927,74.527 81.735,74.527 82.37,73.892 P7.2@82.37,73.7